# Altium PCB SKY32B750_OSPI_EVB1_V3.1.PcbDoc (part 2 of 2)
Units mil, origin at the board's own origin, x right, y up, seen from the top; angles counter-clockwise.
Board outline 3267.72 x 2283.46 mil, 4 copper layers (Top Layer 1, VCC, GND, Bottom Layer 1), stack 22.732 mil thick; 94 components, 135 nets, 508 pads, 620 vias.
Unrouted connection lines stored in the file: 134.
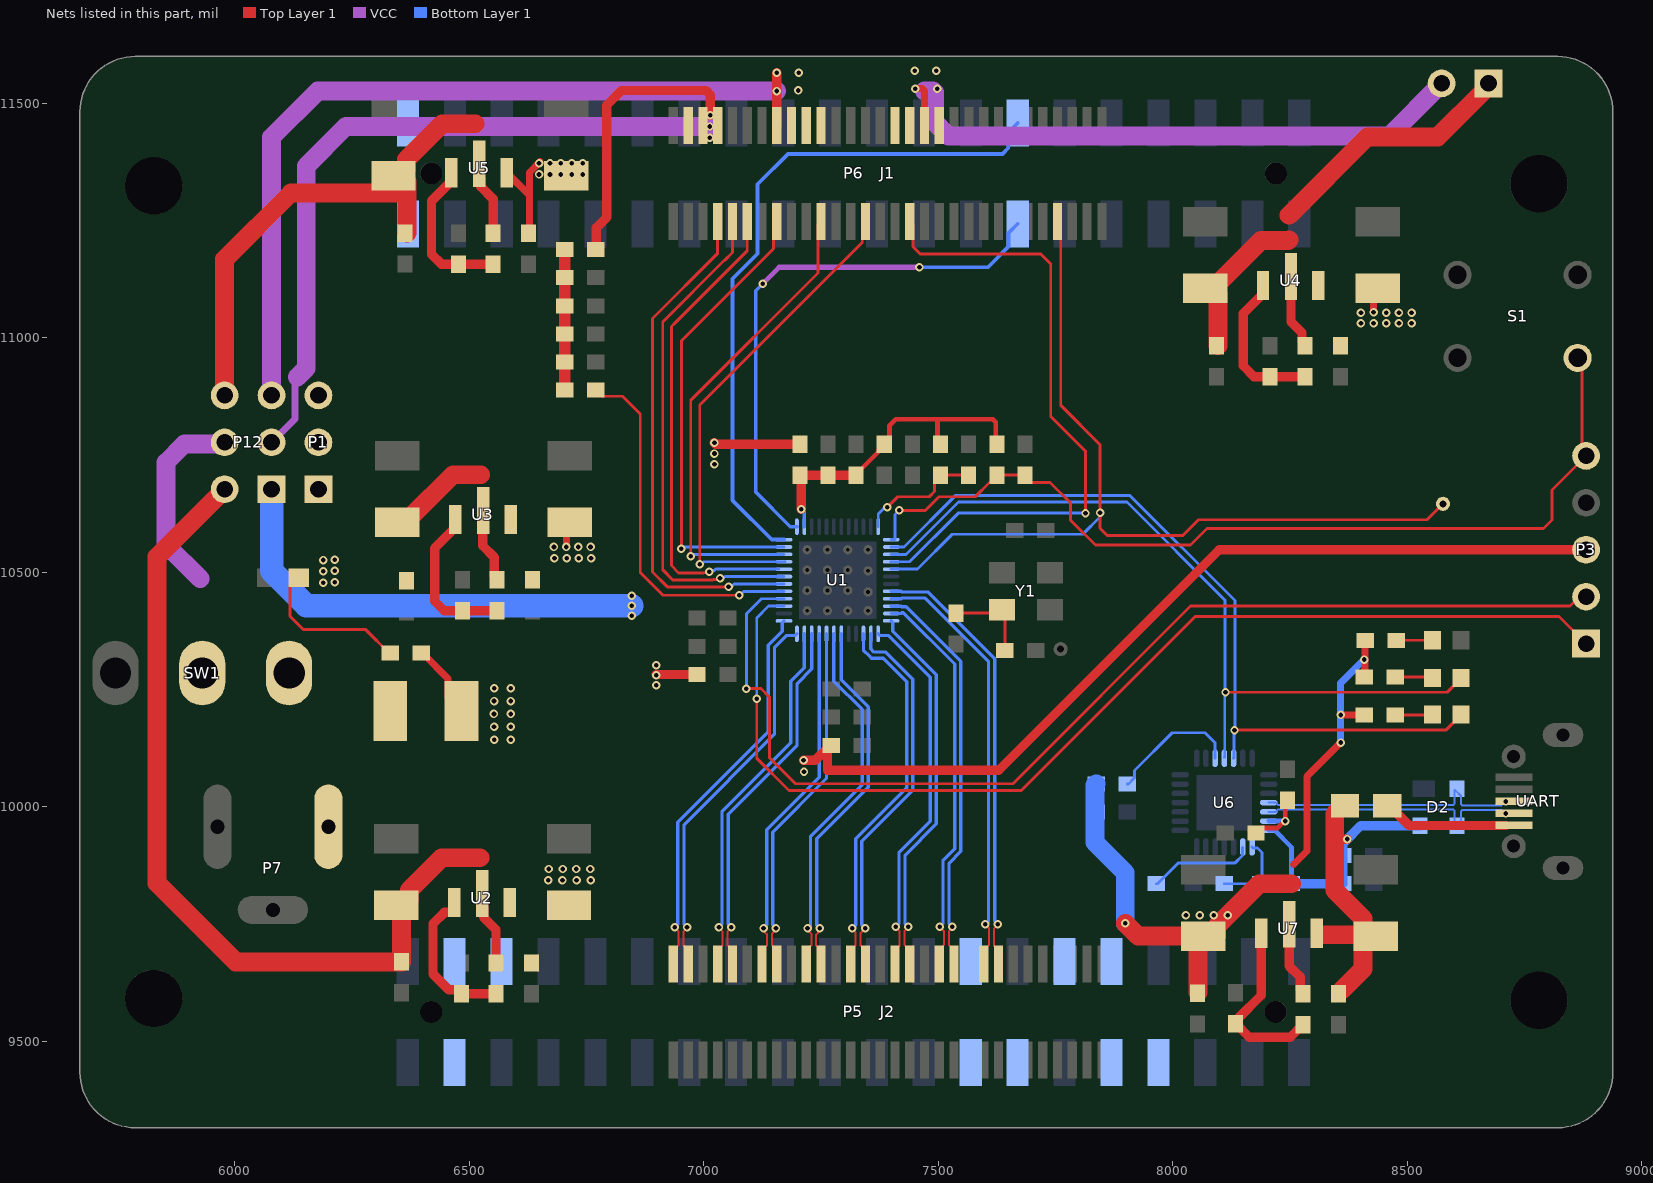
[diagram p4: the nets of this part, all layers, seen from the top]

## Via types
v1: diameter 18, hole 10, Top Layer 1 to Bottom Layer 1, tented both sides, 611 vias
v2: diameter 19.68, hole 7.87, Top Layer 1 to Bottom Layer 1, tented both sides, 9 vias

## Nets (pads, with @x,y where several pads share a name; then routed paths per layer and width w, separated by ;. In a path a pad name is that pad's centre, name@x,y a point inside that pad or via, vN(x,y) a via of type N, cw(c..) or ccw(c..) an arc to the next point about the centre after c; other vN are vias at no path point) (continued)
GPIO_0.8: P6.13 U1.13 | length 1182.4
  VCC w10.87: v1(7126,11115) 7161.24,11150.24 v1(7459.94,11150.24)
  Bottom Layer 1 w8: v1(7126,11115) 7110.91,11099.91 7110.91,10671.09 7184.83,10597.17 U1.13@7198.9,10597.17 ; v1(7459.94,11150.24) 7606.24,11150.24 7650.09,11194.09 7650.09,11223.15 P6.13@7669.69,11242.75
GPIO_0.9: P6.14 U1.12 | length 1468.3
  Bottom Layer 1 w8: U1.12@7171.34,10569.61 7145.39,10569.61 7061.7,10653.3 7061.7,11125.7 7115,11179 7115,11327 7179.79,11391.79 7636.79,11391.79 7649.17,11404.17 7649.17,11437.23 P6.14@7669.69,11457.75
GPIO_3.0: R64.2 U1.5 | length 785.2
  Top Layer 1 w6.16: R64.2@6770,10888 6782.92,10875.08 6826.92,10875.08 6864.89,10837.11 6864.89,10499.57 6913.35,10451.11 v1(7075.94,10451.11)
  Bottom Layer 1 w6.16: v1(7075.94,10451.11) 7077.65,10451.11 7085.93,10459.39 7121.69,10459.39 ; 7119.99,10459.38 U1.5@7171.34,10459.38
IFOUT1.1_N: J2.4 U1.48 | length 824.2
  Top Layer 1 w4.29: v1(6964.69,9743.41) 6964.69,9741.9 6956.84,9734.04 6956.84,9704.89 6966.99,9694.74 J2.4@6966.99,9665.21
  Bottom Layer 1 w7.07: v1(6964.69,9743.41) 6958.23,9749.88 6958.23,9961.74 7151,10154.52 7151,10339.24 7177.05,10365.29 7195.37,10365.29 U1.48@7198.9,10368.83
IFOUT1.1_P: J2.2 U1.1 | length 835.4
  Top Layer 1 w4.29: J2.2@6935.49,9665.21 6935.49,9694.74 6946.55,9705.79 6946.55,9734.04 6938.69,9741.9 v1(6938.69,9743.41)
  Bottom Layer 1 w7.07: v1(6938.69,9743.41) 6945.16,9749.88 6945.16,9967.16 7137.93,10159.93 7137.93,10344.66 7167.81,10374.53 7167.81,10392.85 U1.1@7171.34,10396.39
IFOUT1.2_N: J2.10 U1.46 | length 748.7
  Top Layer 1 w4.29: J2.10@7054.51,9701.7 7053.78,9702.43 7053.39,9702.43 7050.88,9704.95 7050.88,9715.27 7050.81,9715.34 7050.81,9721.29 7050.82,9725.55 7050.8,9733.71 7058.65,9741.57 v1(7058.65,9743.08)
  Bottom Layer 1 w7.07: v1(7058.65,9743.08) 7052.19,9749.54 7052.19,9984.64 7199.07,10131.52 7199.07,10262.59 7230.4,10293.91 U1.46@7230.4,10368.83
IFOUT1.2_P: J2.8 U1.47 | length 749
  Top Layer 1 w4.29: v1(7032.65,9743.08) 7032.65,9741.57 7040.51,9733.71 7040.51,9721.31 7040.52,9711.08 7040.59,9711.01 7040.59,9704.95 7038.07,9702.43 7037.68,9702.43 J2.8@7035.89,9700.64
  Bottom Layer 1 w7.07: v1(7032.65,9743.08) 7039.12,9749.54 7039.12,9990.06 7186,10136.94 7186,10268 7214.65,10296.65 U1.47@7214.65,10368.83
IFOUT1.3_N: J2.16 U1.44 | length 762
  Top Layer 1 w4.29: v1@7154.15,9738.78 7154.15,9737.77 7145.36,9728.98 7145.36,9704.95 7147.87,9702.43 7148.26,9702.43 7155.96,9694.74 J2.16@7155.96,9665.21
  Top Layer 1 w8: v1@7154.15,9738.78 v1(7154.15,9741.48)
  Bottom Layer 1 w7.07: v1(7154.15,9741.48) 7147.5,9748.13 7147.5,9946.02 7261.89,10060.41 U1.44@7261.89,10368.83
IFOUT1.3_P: J2.14 U1.45 | length 760.3
  Top Layer 1 w4.29: J2.14@7124.47,9665.21 7124.47,9694.74 7132.17,9702.43 7132.56,9702.43 7135.07,9704.95 7135.07,9728.12 7130.4,9732.79 7130.4,9738.83 v1(7127.78,9741.45)
  Bottom Layer 1 w7.07: v1(7127.78,9741.45) 7134.43,9748.11 7134.43,9951.43 7246.15,10063.15 U1.45@7246.15,10368.83
IFOUT2.1_N: J2.22 U1.42 | length 783.6
  Top Layer 1 w4.29: v1(7247.47,9740.91) 7244.85,9738.29 7244.85,9732.67 7239.85,9727.67 7239.85,9704.95 7242.36,9702.43 7242.75,9702.43 7250.45,9694.74 J2.22@7250.45,9665.21
  Bottom Layer 1 w7.07: v1(7247.47,9740.91) 7241.01,9747.38 7241.01,9932.01 7351.07,10042.07 7351.07,10212.93 7293.39,10270.61 U1.42@7293.39,10368.83
IFOUT2.1_P: J2.20 U1.43 | length 755.3
  Top Layer 1 w4.29: J2.20@7218.96,9694.74 7226.66,9702.43 7227.05,9702.43 7229.56,9704.95 7229.56,9729.11 7221.47,9737.2 v1(7221.47,9740.91)
  Bottom Layer 1 w7.07: v1(7221.47,9740.91) 7227.94,9747.38 7227.94,9937.42 7338,10047.48 7338,10207.52 7277.64,10267.87 U1.43@7277.64,10368.83
IFOUT2.2_N: J2.28 U1.38 | length 812.2
  Top Layer 1 w4.29: v1(7344.27,9741.19) 7344.27,9740.89 7334.34,9730.96 7334.34,9704.95 7336.85,9702.43 7337.24,9702.43 7344.94,9694.74 J2.28@7344.94,9665.21
  Bottom Layer 1 w7.07: v1(7344.27,9741.19) 7337.23,9748.23 7337.23,9926.74 7446.07,10035.59 7446.07,10272.06 7388.13,10330 7363,10330 7356.38,10336.62 U1.38@7356.38,10368.83
IFOUT2.2_P: J2.26 U1.39 | length 812.1
  Top Layer 1 w4.29: J2.26@7313.45,9665.21 7313.45,9694.74 7321.15,9702.43 7321.54,9702.43 7324.05,9704.95 7324.05,9731.64 7317.12,9738.57 v1(7317.12,9741)
  Bottom Layer 1 w7.07: v1(7317.12,9741) 7324.16,9748.04 7324.16,9932.16 7433,10041 7433,10266.65 7382.72,10316.93 7357.59,10316.93 7353.76,10320.76 7340.63,10333.88 U1.39@7340.63,10368.83
IFOUT2.3_N: J2.34 U1.36 | length 843.9
  Top Layer 1 w4.29: v1(7435.92,9744.11) 7435.92,9742.66 7428,9734.74 7428,9706.17 7437.68,9696.49 7439.43,9694.74 J2.34@7439.43,9665.21
  Top Layer 1 w8: v1(7435.92,9744.11) v1@7437.68,9742.35 ; J2.34@7437.68,9696.49 7437.68,9666.96 J2.34@7439.43,9665.21
  Bottom Layer 1 w7.07: U1.36@7399.69,10396.39 7403.22,10392.85 7403.22,10374.53 7496.07,10281.69 7496.07,9963.59 7429.39,9896.91 7429.39,9750.64 v1(7435.92,9744.11)
IFOUT2.3_P: J2.32 U1.37 | length 797.9
  Top Layer 1 w4.29: J2.32@7407.93,9665.21 7407.93,9694.74 7417.71,9704.52 7417.71,9734.74 7409.79,9742.66 v1(7409.79,9744.11)
  Bottom Layer 1 w7.07: U1.37@7372.13,10368.83 7375.67,10365.29 7393.98,10365.29 7483,10276.27 7483,9969 7416.32,9902.32 7416.32,9750.64 v1(7409.79,9744.11)
IFOUT3.1_N: J2.40 U1.34 | length 862.5
  Top Layer 1 w4.29: v1(7529.83,9744.13) 7529.83,9741.73 7522.85,9734.76 7522.85,9705.8 7533.92,9694.74 J2.40@7533.92,9665.21
  Bottom Layer 1 w7.07: U1.34@7399.69,10427.88 7420.94,10427.88 7422.28,10426.54 7431.41,10426.54 7548.07,10309.89 7548.07,9905.07 7523.19,9880.19 7523.19,9750.76 v1(7529.83,9744.13)
IFOUT3.1_P: J2.38 U1.35 | length 841.3
  Top Layer 1 w4.29: J2.38@7502.42,9665.21 7510.12,9672.91 7510.12,9703.73 7512.56,9706.18 7512.56,9734.32 7503.49,9743.39 v1(7503.49,9744.42)
  Bottom Layer 1 w7.07: U1.35@7399.69,10412.13 7420.94,10412.13 7422.28,10413.47 7426,10413.47 7535,10304.47 7535,9910.48 7510.12,9885.61 7510.12,9751.06 v1(7503.49,9744.42)
IFOUT3.2_N: J2.46 U1.32 | length 940.3
  Top Layer 1 w4.29: v1(7626.93,9749.92) 7626.93,9748.63 7618.85,9740.55 7618.85,9704.3 7628.41,9694.74 J2.46@7628.41,9665.21
  Bottom Layer 1 w7.07: U1.32@7399.69,10459.38 7420.94,10459.38 7422.28,10458.04 7477.41,10458.04 7620.3,10315.15 7620.3,9756.54 v1(7626.93,9749.92)
IFOUT3.2_P: J2.44 U1.33 | length 919.5
  Top Layer 1 w4.29: J2.44@7596.91,9665.21 7596.91,9694.74 7608.56,9706.38 7608.56,9740.64 7600.61,9748.59 v1(7600.61,9750.01)
  Bottom Layer 1 w7.07: U1.33@7399.69,10443.63 7420.94,10443.63 7422.28,10444.97 7472,10444.97 7607.23,10309.74 7607.23,9756.63 v1(7600.61,9750.01)
IO45: P5.16
IO57: P5.7
MD0: P5.38
MD1: P5.37
MD2: P5.36
MISO: P5.10
MOSI: P5.9
NetC5_1: C5.1 R1.2 Y1.1 | length 190.2
  Top Layer 1 w6.16: C5.1@7538,10413 7628.61,10413 Y1.1@7635.61,10420.01 7642,10413.62 R1.2@7642,10333
NetD1_1: D1.1 R31.2 | length 333.8
  Top Layer 1 w6.16: D1.1@6137,10487.87 6135.03,10487.87 6118.43,10471.26 6118.43,10406.43 6147.2,10377.66 6279.84,10377.66 R31.2@6329.5,10328
NetF1_1: F1.1 SW1.2
NetP7_1: P7.1 SW1.3
NetPWR_1: PWR.1 R9.2 | length 79.5
  Top Layer 1 w6.16: R9.2@8476.58,10355 PWR.1@8556.06,10355
NetR10_1: R10.1 R11.1 U6.8 | length 170.7
  Bottom Layer 1 w6.16: R11.1@8110,9836.19 8184.52,9836.19 R10.1@8187.02,9836.19 8190,9839.17 8190,9902.88 8180.59,9912.29 8171.28,9912.29 U6.8@8169.06,9914.51
NetR12_1: R12.1 U6.9 | length 225.5
  Bottom Layer 1 w6.16: R12.1@7964.83,9836.19 7967.33,9836.19 8011.1,9879.96 8131.95,9879.96 8148.29,9896.3 U6.9@8148.29,9913.43
NetR13_1: R13.1 TX.1 | length 79.9
  Top Layer 1 w6.16: R13.1@8474.45,10195.92 8552.86,10195.92 TX.1@8553.94,10197
NetR14_1: R14.1 RX.1 | length 80.1
  Top Layer 1 w6.16: R14.1@8474.45,10276.47 8552.46,10276.47 RX.1@8553.94,10275
NetR21_2: R21.2 R22.2 R23.2 R24.2 R50.1 R64.1 | length 300
  Top Layer 1 w25: R64.1@6704,10888 R24.2@6704,10948 R23.2@6704,11008 R22.2@6704,11068 R21.2@6704,11128 R50.1@6704,11188
NetR25_1: R25.1 R26.2 U7.1 | length 381.5
  Top Layer 1 w20: U7.1@8188.34,9730.57 8188.34,9598.34 8140,9550 8140,9544 R26.2@8134,9538 8163,9509 8250.53,9509 R25.1@8277.33,9535.8
NetR35_1: R35.1 R36.2 U2.1 | length 334.8
  Top Layer 1 w20: U2.1@6468.46,9796.07 6468.46,9778.29 6465.23,9775.06 6447.46,9775.06 6423.12,9750.72 6423.12,9643.88 6457.2,9609.8 6477.78,9609.8 6483.78,9603.8 R36.2@6483.78,9601.3 R35.1@6557.45,9601.3
NetR54_1: R54.1 R56.2 U3.1 | length 333.2
  Top Layer 1 w20: U3.1@6470.34,10612.57 6470.34,10594.8 6427,10551.45 6427,10438 6447.2,10417.8 R56.2@6485.67,10417.8 R54.1@6559.33,10417.8
NetR55_1: R55.1 R57.2 U4.1 | length 330.1
  Top Layer 1 w6.16: U4.1@8192.34,11093.8 U4.1@8192.34,11111.57
  Top Layer 1 w20: U4.1@8192.34,11093.8 8150,11051.45 8150,10940 8173.2,10916.8 R57.2@8207.67,10916.8 R55.1@8281.33,10916.8
NetR58_1: R58.1 R59.2 U5.1 | length 331.2
  Top Layer 1 w20: U5.1@6462.34,11351.57 6462.34,11333.8 6420,11291.45 6420,11178 6441.2,11156.8 R59.2@6477.67,11156.8 R58.1@6551.33,11156.8
RAMSYNC: J1.53 pad.2@8576,10646 U1.29 | length 1957.7
  Top Layer 1 w6.16: J1.53@7754.39,11247.89 7761.15,11241.13 7761.15,10855.85 7845,10772 v1(7845,10627) 7845,10594 7861,10578 8021,10578 8055,10612 8542,10612 pad.2@8576,10646
  Bottom Layer 1 w6.16: U1.29@7399.69,10506.62 7400.02,10506.95 7455.78,10506.95 7529.83,10581 7808,10581 7845,10618 v1(7845,10627)
RF1_CS: J1.15 U1.11 | length 998.9
  Top Layer 1 w6.16: v1(6952.48,10550.05) 6952.48,10992.94 6959.31,10999.78 ; 6959.26,10999.83 7149.2,11189.76 7149.2,11241.13 J1.15@7155.96,11247.89
  Bottom Layer 1 w6.16: v1@6955.98,10550.35 6959.5,10553.87 U1.11@7171.34,10553.87
RF2_CS: J1.21 U1.10 | length 1031.6
  Top Layer 1 w6.16: v1(6972.57,10534.37) 6972.57,10866.57 7243.69,11137.69 7243.69,11241.13 J1.21@7250.45,11247.89
  Bottom Layer 1 w6.16: v1@6968.4,10538.12 U1.10@7171.34,10538.12
RF3_CS: J1.27 U1.9 | length 1061
  Top Layer 1 w6.16: v1@6990.86,10517.46 6991.84,10518.44 6991.84,10856.84 7338.18,11203.18 7338.18,11241.13 J1.27@7344.94,11247.89
  Bottom Layer 1 w6.16: v1(6991.84,10516.83) 6995.05,10516.83 7000.67,10522.46 7045.46,10522.46 7045.55,10522.37 U1.9@7171.34,10522.37 7172.91,10522.37 U1.9@7173.22,10522.68
RF4_CS: J1.33 U1.28 | length 1384.7
  Top Layer 1 w6.16: J1.33@7439.43,11247.89 7446.19,11241.13 7446.19,11194 7462.19,11178 7719,11178 7740,11157 7740,10832 7814,10758 v1(7814,10626)
  Bottom Layer 1 w6.16: U1.28@7399.69,10522.37 7438.95,10522.37 7542.58,10626 v1(7814,10626)
RST_N: C12.2 P3.5 R3.1 S1.4 U1.25 | length 1988.1
  Top Layer 1 w6.16: v1(7417,10632) 7473,10632 7502,10661 7579,10661 7609.58,10691.58 7612.08,10691.58 7625,10704.5 R3.1@7625,10707 C12.2@7685,10707 7685,10704.5 7697.92,10691.58 7738.42,10691.58 7782,10648 7782,10611 7793,10600 7835,10558 8038,10558 8073,10593 8790,10593 8808.44,10611.44 8808.44,10675.44 P3.5@8881,10748 8872,10757 8872,10948 S1.4@8863,10957
  Bottom Layer 1 w6.16: U1.25@7399.69,10569.61 7407.37,10569.61 7408.16,10570.41 7408.16,10623.16 v1(7417,10632)
RTS: R16.2 U6.24 | length 283.4
  Bottom Layer 1 w6.16: R16.2@7903,10049 7905.5,10049 7918.42,10061.92 7918.42,10077.42 7999,10158 8068.63,10158 8089.63,10137 8089.63,10104.17 U6.24@8090.31,10103.49
SCL: P6.39
SD: P5.13
SDA: P6.40
SPICLK_RF: J1.11 U1.8 | length 1035.3
  Top Layer 1 w6.16: 6939.39,11031.96 6931.24,11023.81 6931.24,10514.22 6946.7,10498.75 6999.33,10498.75 6999.55,10498.97 v1@7008.53,10498.97 ; 6939.57,11031.78 7092.97,11185.18 J1.11@7092.97,11247.89
  Bottom Layer 1 w6.16: v1(7011.77,10501.24) 7014.04,10503.51 7022.88,10503.51 7026,10506.62 7159.6,10506.62 U1.8@7160.06,10507.08
SPIMISO_RF: J1.7 U1.6 | length 1100.3
  Top Layer 1 w6.16: J1.7@7029.98,11247.89 7029.98,11180.02 6890.9,11040.94 6890.9,10500.68 6922.64,10468.93 7051.47,10468.93 v1@7052.33,10468.08
  Bottom Layer 1 w6.16: v1(7053.21,10469.45) 7055.04,10471.27 7060.82,10471.27 7064.78,10475.23 7120.06,10475.23 ; 7120.06,10475.13 U1.6@7171.34,10475.13
SPIMOSI_RF: J1.9 U1.7 | length 1074.3
  Top Layer 1 w6.16: v1(7034.96,10487.01) 7032.69,10484.75 7020.85,10484.75 7019.26,10483.16 6935.03,10483.16 6912.92,10505.27 6912.92,11033.53 7044.81,11165.42 ; 7044.98,11165.24 7061.48,11181.74 J1.9@7061.48,11247.89
  Bottom Layer 1 w6.16: v1@7036.1,10485.99 7037.64,10487.53 7042.49,10487.53 7045.83,10490.87 U1.7@7171.34,10490.87
SSN: P5.12
SWD_CLK: P3.1 U1.3 | length 2341.4
  Top Layer 1 w6.16: v1(7113.29,10230.41) 7113.29,10103.71 7182,10035 7677,10035 8048,10406 8823,10406 P3.1@8881,10348
  Bottom Layer 1 w6.16: v1(7113.29,10230.41) 7113.29,10402.71 7138.45,10427.88 U1.3@7171.34,10427.88
SWD_DIO: P3.2 U1.4 | length 2367.7
  Top Layer 1 w6.16: v1(7091,10252) 7122,10252 7140,10234 7140,10105 7195.84,10049.16 7659.16,10049.16 8038,10428 8846.69,10428 8866.69,10448 P3.2@8881,10448
  Bottom Layer 1 w6.16: v1(7091,10252) 7091,10411.04 7123.59,10443.63 U1.4@7171.34,10443.63
TEST_MODE: R5.1 R6.2 U1.24 | length 267
  Top Layer 1 w6.16: v1(7391.43,10638.61) 7413.82,10661 7481,10661 7492.08,10672.08 7492.08,10694.08 R6.2@7505,10707 R5.1@7565,10707
  Bottom Layer 1 w6.16: U1.24@7372.13,10597.17 7372.13,10624.13 7384.35,10636.35 7389.17,10636.35 v1(7391.43,10638.61)
UART_RX: TX.2 U1.26 U6.26 | length 1706.1
  Top Layer 1 w6.16: v1(8131.53,10163.38) 8581.93,10163.38 8614.57,10196.02 TX.2@8614.57,10197
  Bottom Layer 1 w6.16: U1.26@7399.69,10553.87 7427.14,10553.87 7537.28,10664 7908,10664 8132.41,10439.59 8132.41,10164.26 v1(8131.53,10163.38) 8130.61,10162.46 8130.61,10104.41 U6.26@8129.69,10103.49
UART_TX: RX.2 U1.27 U6.25 | length 1696.4
  Top Layer 1 w6.16: v1(8112.33,10244.37) 8584.92,10244.37 8614.57,10274.02 RX.2@8614.57,10275
  Bottom Layer 1 w6.16: U1.27@7399.69,10538.12 7431.42,10538.12 7543.14,10649.84 7902.13,10649.84 8111.49,10440.49 8111.49,10245.22 v1(8112.33,10244.37) 8110.74,10242.79 8110.74,10106.39 U6.25@8110,10105.65
USB_N: D2.3 U6.5 UART.2 | length 571.2
  Bottom Layer 1 w4.29: U6.5@8204.49,9989.32 8219.32,9989.32 8224.02,9994.01 8598.23,9994.01 8600.74,9991.5 8600.74,9957 8614.34,9970.6 8614.34,9990.41 8616.86,9992.93 8700.63,9992.93 8704.76,9988.8 v1@8710,9988.8
  other v1: 8710,9985.8
USB_P: D2.2 U6.4 UART.3 | length 564.4
  Bottom Layer 1 w4.29: U6.4@8204.49,10009 8219.32,10009 8224.02,10004.3 8598.23,10004.3 8600.74,10006.82 8600.74,10035.74 8601.77,10035.74 8614.34,10023.17 8614.34,10005.73 8616.86,10003.22 8700.45,10003.22 8708.87,10011.64 v1@8709.76,10011.64
  other v1: 8710,10011.4
V_MCU: C13.2 C15.1 P12.2 R35.2 U2.2 | length 2007.3
  Top Layer 1 w20: U2.2@6528.12,9815.3 6528.12,9788.29 6531.34,9785.06 6531.34,9764.27 6557.45,9738.16 R35.2@6557.45,9667.3
  Top Layer 1 w40: P12.2@5979,10677 5835,10533 5835,9837 6002.5,9669.5 C13.2@6356.12,9669.5 6356.12,9783.65 6362.41,9789.94 C15.1@6362.41,9791.51 ; C15.1@6345.08,9789.94 6360.83,9789.94 6372.33,9801.44 6372.33,9822.33 6441.51,9891.51 6523.13,9891.51
V_RF1: C8.2 C17.1 P12.4 R54.2 U3.2 | length 802.9
  Top Layer 1 w6.16: U3.2@6529.14,10621 6529.14,10630.94 U3.2@6530,10631.8
  Top Layer 1 w20: U3.2@6529.14,10621 6529.14,10556.5 6553.33,10532.3 6553.33,10489.8 R54.2@6559.33,10483.8
  Top Layer 1 w40: C17.1@6346.97,10606.44 6364.29,10606.44 6364.29,10608.02 6374.21,10617.94 6375.79,10617.94 6465.86,10708.02 6525.02,10708.02
  VCC w40: 5926.96,10486.04 5854,10559 5854,10734 5893.35,10773.35 5975.35,10773.35 P12.4@5979,10777
  other v1: 6189,10477.87 6214,10478.87 6189,10501.94 6214,10502.94 6189,10526 6214,10527
V_RF2: C23.2 C25.1 P12.6 R58.2 U5.2 | length 1247.8
  Top Layer 1 w20: U5.2@6522,11370.8 6522,11343.79 6525.23,11340.56 6525.23,11321.77 6551.33,11295.67 R58.2@6551.33,11222.8
  Top Layer 1 w40: P12.6@5979,10877 5979,11167 6120.44,11308.44 6340.97,11308.44 ; C25.1@6338.97,11345.44 C25.1@6354.72,11345.44 ; 6356.72,11308.44 6358.29,11308.44 6358.29,11310.02 C25.1@6367.69,11319.42 ; C23.2@6367.69,11223 C25.1@6367.69,11319.42 ; 6513,11456 6443,11456 6366.21,11379.21 6366.21,11356.94 C25.1@6354.72,11345.44 ; C25.1@6354.72,11345.44 6367.69,11332.47 C25.1@6367.69,11319.42
V_RF3: C19.2 C21.1 P13.1 R55.2 U4.2 | length 1054.9
  Top Layer 1 w20: U4.2@8252,11130.8 8252,11034 8275.33,11010.67 8275.33,10991.3 8281.33,10985.3 R55.2@8281.33,10982.8
  Top Layer 1 w40: C21.1@8068.97,11105.44 C21.1@8084.72,11105.44 ; C19.2@8096.21,10983 8096.21,11093.95 C21.1@8084.72,11105.44 ; 8248,11209 8246.02,11207.02 8187.86,11207.02 8097.79,11116.94 8096.21,11116.94 8086.29,11107.02 8086.29,11105.44 C21.1@8084.72,11105.44 ; 8248,11261 8415,11428 8564.66,11428 8663.47,11526.81 8663.47,11532.47 P13.1@8673,11542
VCC3V0_MCU: P3.3 P12.1 R32.1 R33.1 R34.1 | length 3163.3
  Top Layer 1 w20: v1@6899,10282 R34.1@6986,10282 ; v1(7023,10776) 7026,10773 R32.1@7205,10773 ; v1(7213,10099) 7237.5,10099 7263.5,10125 7264,10125 7264,10078 7629,10078 8099,10548 P3.3@8881,10548
  Bottom Layer 1 w50: P12.1@6079,10677 6079,10503.11 6153.11,10429 v1@6847,10429
  other v1: 7214,10075 6899,10259 6899,10280.5 6899,10302 6847,10407 6847,10428.5 6847,10450 7023,10730 7023,10753
VCC3V0_RF1: J1.4 J1.6 J1.8 P12.3 R50.2 | length 2112.8
  Top Layer 1 w20: R50.2@6770,11188 6771,11189 6771,11234 6793.45,11256.45 6793.45,11495.45 6825,11527 7005,11527 7014,11518 v1(7014,11474)
  VCC w15: P12.3@6079,10777 6129,10827 6129,10911 6134,10916
  VCC w40: 6134,10916 6153,10935 6153,11365.62 6237.56,11450.18 v1(7013,11450.18)
  other v1: 7013,11426
VCC3V0_RF2: J1.16 J1.18 J1.20 J1.22 P12.5 | length 1779.9
  Top Layer 1 w20: J1.16@7155.96,11452.61 v1(7156,11565) v1(7156,11565)
  VCC w40: P12.5@6079,10877 6079,11427 6177.64,11525.64 v1(7155.59,11525.64)
  other v1: 7202,11527 7203,11565
VCC3V0_RF3: J1.32 J1.34 J1.36 J1.38 P13.2 | length 1320.5
  Top Layer 1 w15: v1(7451,11530.88) 7466.12,11530.88 7470.93,11526.07 J1.36@7470.93,11452.61
  VCC w40: 7470.93,11526.07 7488.93,11526.07 7492,11523 7492,11460 7522,11430 8461,11430 P13.2@8573,11542
  other v1: 7498,11530.88 7450,11569 7496,11569
VCC5V: C9.1 C14.1 C16.2 C18.2 C20.1 C22.2 C24.1 C26.2 F1.2 R31.1 U2.3 U3.3 U4.3 U5.3 | length 517.4
  Top Layer 1 w15: R31.1@6398,10328 6400.5,10328 6455.5,10273 6455.5,10232.5 F1.2@6484,10204 ; U5.3@6586.18,11364.5 6580.45,11358.77 U5.3@6580.45,11351.57 6628.5,11303.52 ; C26.2@6627,11222.8 6628.5,11224.3 6628.5,11303.52 ; v1@6651,11375 6628.5,11352.5 6628.5,11303.52 ; v1(6707,10554) 6707.5,10554.5 6707.5,10598.98 C9.1@6714.97,10606.44 ; v1(8428,11054) 8428,11096.48 C20.1@8436.97,11105.44
  other v1: 6669.12,9843.5 6699.12,9843.5 6729.12,9843.5 6759.12,9843.5 6670.12,9867.5 6699.45,9867.5 6728.78,9867.5 6758.12,9867.5 6554,10143 6589,10143 6553.33,10170.5 6589,10170.5 6553,10198 6589,10198 6553.33,10225.5 6589,10225.5 6554,10253 6589,10253 6682,10530 6708,10530 6734,10530 6760,10530 6681,10554 6733,10554 6759,10554 8401,11031 8428,11031 8455,11031 8482,11031 8509,11031 8401,11053 8455,11053 8482,11053 8509,11053 6649.25,11348 6672.5,11348 6695.75,11348 6719,11348 6742.25,11348 6649.25,11372 6672.5,11372 6695.75,11372 6719,11372 6742.25,11372
VDD: C32.1 C33.1 U6.6 | length 155.2
  Top Layer 1 w10: C33.1@8177.48,9943.74 8188.48,9954.74 8222.94,9954.74 8237.84,9969.63 v1(8240,9969.63) 8240,10009 C32.1@8245,10014
  Bottom Layer 1 w10: U6.6@8204.49,9969.63 v1(8240,9969.63)
VDD_3V0: C34.1 C35.2 P1.1 P1.2 P1.3 R9.1 R12.2 R13.2 R14.2 R15.1 R16.1 R25.2 U7.2 | length 1683.2
  Top Layer 1 w15: 8257,9877 8286,9906 8286,10065.15 v1(8357.92,10137.08) ; v1(8357.92,10195.92) R13.2@8408.45,10195.92 R13.2@8406.53,10194 ; 8408.45,10293.86 R14.2@8408.45,10276.47 8409.52,10277.54 8409.52,10353.94 R9.1@8410.58,10355
  Top Layer 1 w20: U7.2@8248,9749.8 8248,9661 8271.33,9637.67 8271.33,9610.3 8277.33,9604.3 R25.2@8277.33,9601.8
  Top Layer 1 w40: v1(7899,9752) 7926.56,9724.44 C34.1@8064.97,9724.44 ; C35.2@8054,9604.71 8054,9713.48 C34.1@8064.97,9724.44 ; 8253.02,9836.19 8184.4,9836.19 8117.1,9768.9 8093.63,9745.42 8093.63,9724.44 C34.1@8064.97,9724.44
  Bottom Layer 1 w15: v1(8357.92,10137.08) v1(8357.92,10195.92) 8357.92,10264.03 v1(8407.89,10314)
  Bottom Layer 1 w40: R16.1@7837,10049 7834,10046 7834,9924.51 7898.83,9859.68 R12.2@7898.83,9836.19 7898.83,9752.17 v1(7899,9752)
  other v1: 8028,9769 8057.67,9769 8087.33,9769 8117,9769
VDD_5V: C30.1 C31.1 C36.1 C37.2 D2.4 F2.2 R10.2 U6.7 U7.3 | length 1086.7
  Top Layer 1 w20: 8345,9931.29 v1(8371.86,9931.29)
  Top Layer 1 w40: U7.3@8319.07,9727.51 C36.1@8405.72,9727.51 ; C37.2@8361.6,9610.4 8405.72,9654.53 8405.72,9712.95 8417.22,9724.44 8405.72,9735.94 8405.72,9761.35 8345,9822.08 8345,9931.29 8345,9985 8362,10002 F2.2@8367,10002
  Bottom Layer 1 w10: U6.7@8204.49,9949.94 8217.28,9949.94 8253.02,9914.2 R10.2@8253.02,9836.19
  Bottom Layer 1 w20: R10.2@8253.02,9836.19 C30.1@8362.13,9836.19 C31.1@8362.13,9896.32 8362.13,9921.56 8367.98,9927.4 8400.58,9960 D2.4@8527,9960
VDD_IO: C10.2 C11.2 R3.2 R6.1 R8.1 R32.2 U1.14 | length 743.7
  Top Layer 1 w10: C11.2@7325,10707 7325,10709.5 7374,10758.5 7374,10762 R8.1@7385,10773 7396,10784 7396,10812 7410,10826 7498.52,10826 ; R6.1@7505,10773 7498.52,10779.48 7498.52,10826 ; R3.2@7625,10773 7622.52,10775.48 7622.52,10820.14 7616.66,10826 7498.52,10826
  Top Layer 1 w20: v1(7208,10634) 7208,10704 R32.2@7205,10707 C10.2@7265,10707 C11.2@7325,10707
  Bottom Layer 1 w8: v1(7208,10634) 7208,10631.29 7214.59,10624.71 U1.14@7214.65,10597.17 U1.14@7214.65,10597.17 v1@7214.65,10634
VIN: F2.1 UART.1 | length 270.3
  Top Layer 1 w20: F2.1@8457,10002 8462,10002 8503.8,9960.2 UART.1@8710,9960.2
WS: P5.15
pads on no net: J2.50 J2.52 J2.56 J2.58 P5.1 P5.2 P5.3 P5.4 P5.8 P5.17 P5.18 P5.39 P5.40 P6.1 P6.2 P6.3 P6.4 P6.24 P6.38 P7.2 S1.1 S1.2 SW1.1 U6.1 U6.2 U6.10 U6.11 U6.12 U6.13 U6.14 U6.15 U6.16 U6.17 U6.18 U6.19 U6.20 U6.21 U6.22 U6.27 U6.28

## Polygon pours and split planes (outlines as drawn)
DVSS on Bottom Layer 1 "Bottom Layer" (solid, remove dead copper, pour order 27): 5788.58,11599.56 ccw(c5788.58,11481.45) 5670.47,11481.45 5670.47,9434.2 ccw(c5788.58,9434.2) 5788.58,9316.09 8820.08,9316.09 ccw(c8820.08,9434.2) 8938.19,9434.2 8938.19,11486.84 ccw(c8819.63,11481) 8813.79,11599.56
DVSS on Top Layer 1 "Top Layer 1-DVSS" (solid, remove dead copper, pour order 29): 5788.58,11599.56 ccw(c5788.58,11481.45) 5670.47,11481.45 5670.47,9434.2 ccw(c5788.58,9434.2) 5788.58,9316.09 8820.08,9316.09 ccw(c8820.08,9434.2) 8938.19,9434.2 8938.19,11486.84 ccw(c8819.63,11481) 8813.79,11599.56
DVSS on GND (split plane): 8839.24,11577.78 8851.65,11574.46 8863.52,11569.54 8874.65,11563.12 8884.84,11555.3 8893.93,11546.21 8901.75,11536.02 8908.17,11524.89 8913.09,11513.02 8916.42,11500.61 8918.09,11487.87 8918.09,11481.45 8918.09,9434.2 8918.09,9427.78 8916.42,9415.04 8913.09,9402.63 8908.17,9390.76 8901.75,9379.63 8893.93,9369.44 8884.84,9360.35 8874.65,9352.53 8863.52,9346.11 8851.65,9341.19 8839.24,9337.87 8826.5,9336.19 5782.16,9336.19 5769.42,9337.87 5757.01,9341.19 5745.14,9346.11 5734.01,9352.53 5723.82,9360.35 5714.73,9369.44 5706.91,9379.63 5700.49,9390.76 5695.57,9402.63 5692.25,9415.04 5690.57,9427.78 5690.57,9434.2 5690.57,11481.45 5690.57,11487.87 5692.25,11500.61 5695.57,11513.02 5700.49,11524.89 5706.91,11536.02 5714.73,11546.21 5723.82,11555.3 5734.01,11563.12 5745.14,11569.54 5757.01,11574.46 5769.42,11577.78 5782.16,11579.46 8826.5,11579.46

## Keep-outs
Keep-Out Layer:
  the board outline again, w3.94

## Other copper
Top Layer 1:
  rectangle net DVSS: 8038,9402 8093,9537
  rectangle net VCC3V0_RF3: 7397,11470 7512,11583
  rectangle net DVSS: 7272,11461 7386,11548.08
  rectangle net DVSS: 8053,9518 8104,9556
  rectangle net DVSS: 7051,11466 7133.94,11579
  rectangle net VCC3V0_RF2: 7144,11473 7260,11580
  rectangle net VCC5V: 6641,11289 6756,11373
  rectangle net VCC3V0_MCU: 6888,10247 6919,10312
  rectangle net VCC5V: 6484,10134 6606,10268
  rectangle net VCC3V0_RF1: 6962,11417 7031,11484
  rectangle net DVSS: 7179.22,10375.32 7388.13,10589.3
  region net VCC5V: 6587.16,11383 6758,11383 6758,11373 6756,11289 6671,11286 6645,11260 6645,11195 6613,11195 6613,11265 6587.16,11286
  region net VCC3V0_MCU: 7204.55,10790.5 7011.94,10790.5 7010,10789 7010,10711.15 7025.85,10711.15 7046.15,10711.15 7091,10756 7205,10756
  pour cut-out: 7524.57,10545.57 7584,10605 7750,10605 7798.77,10556.23 7798.77,10342.03 7771.08,10314.34 7546.72,10314.34 7521.81,10339.24
  region net VCC3V0_MCU: 7210,10109 7204,10103 7204,10071 7211,10064 7261.55,10064 7262,10064.45 7262,10109 7261,10110
  region net DVSS: 6925,11250.15 6925,11152.18 6977.2,11152.18 7007,11181.98 7007,11250.15
  region net VCC5V: 8298,11141 8298,11081 8324,11063 8343,11036 8343,10971 8372.89,10971 8372.89,11022 8513,11022 8518,11028.15 8518,11091 8390,11091 8325,11091 8324,11141
  region net V_RF1: 6297,10614 6242,10559 6180,10559 6180,10471 6190,10461 6399,10461 6399,10611 6394,10616
  region net VDD_3V0: 8020,9782 8126,9782 8134,9774 8134,9768 8106,9740 8099,9747 8019,9747
  region net VCC5V: 6585.12,9827.32 6637.29,9879.5 6766.12,9879.5 6771.12,9874.5 6771.12,9860.5 6771.12,9754.5 6766.12,9749.5 6671.12,9749.5 6650.12,9728.5 6650.12,9664.5 6618.12,9664.5 6617.12,9665.5 6617.12,9747.5 6600.12,9764.5 6588.12,9764.5
  region net VCC5V: 6576,10603 6576,10570 6618,10528 6618,10480 6772,10480 6777,10485 6776,10486 6776,10601
  region net NetF1_1: 5883,10360 5878,10355 5878,10217 6001,10094 6349,10094 6374,10119 6374,10196 6160.08,10196 6051,10196 5982,10265 5982,10350 5969,10363
VCC:
  rectangle net VCC5V: 8388,11022 8513,11252
  rectangle net VCC3V0_RF3: 7439.43,11503 7512,11583
  rectangle net VCC3V0_RF2: 7144,11506 7214,11580
  rectangle net VCC3V0_RF1: 6996,11417 7031,11486
  rectangle net VCC5V: 6641,11271 6758,11373
  rectangle net VDD_3V0: 7974,9509 8130,9806
  region net VDD_3V0: 6150,10887.26 6150,10650 6160,10640 6184.85,10640 6296.85,10528 6293,10524.15 6293,9741 6636,9398 8008,9398 8128.58,9518.58 8128.58,9523.94 6736.06,9523.95 6397,9863 6397,10921 6190.72,10921
  region net VCC3V0_MCU: 7011.72,10790.72 6831,10790.72 6831,10610 6831,10070 6884.4,10016.6 7228,10016.6 7228,10087 7228,10107 7208,10107 6935,10107 6919,10123 6919,10567 6919,10608 7044,10711.15 7044,10790.72
  region net V_RF1: 6200.05,10559 6157.05,10516 5925.13,10516 5900,10490.87 5925.87,10465 6227,10465 6228,10466 6228,10560
  region net VCC5V: 6527,9882 6527,11210.47 6608.53,11292 8509,11292 8509,11225 6801,11225 6777,11201 6777,11131 6777,9764 6645,9764
  region net NetP7_1: 6067,10299 6067,10181 6164,10084 6164,9872 6179,9857 6225,9857 6234,9866 6234,10277 6157,10354 6156,10353 6069,10353
Bottom Layer 1:
  rectangle net VCC3V0_MCU: 6831,10396 6872,10461

## Silkscreen, mask and mechanical layers (free items; w line width, h text height)
Top Overlay:
  drawing of 3110 lines, arcs and shapes, not listed
  text "0.3" at 7951,11588 h30 r270
  text "0.9" at 7656,11587 h30 r270
  text "0.8" at 7711,11587 h30 r270
  text "0.7" at 7762,11587 h30 r270
  text "0.6" at 7817,11587 h30 r270
  text "0.5" at 7867,11587 h30 r270
  text "0.4" at 7909,11587 h30 r270
  text "0.2" at 7995,11587 h30 r270
  text "0.1" at 8056,11587 h30 r270
  text "0.0" at 8112.58,11587.35 h30 r270
  text "SKY32B750_OSPI_EVB_V3.1" at 5767,11493 h40
  text "V_RF3" at 8532,11453 h30 r270
  text "4 3 2 1" at 6914,11144 h30 r270
  text "CHIPEN" at 6975,11136 h30 r270
  text "USB_3V" at 6140,10938 h35
  text "V_RF2" at 5799,10860 h40
  text "RST" at 8583,10829 h100
  text "V_RF1" at 5796,10759 h40
  text "RST" at 8816.55,10696.73 h30 r90
  text "SYNC" at 8551,10680 h25
  text "V_MCU" at 5794,10655 h40
  text "G" at 8816.56,10634.32 h30 r90
  text "3V" at 8816.56,10516.37 h30 r90
  text "POWER_ON" at 6208.83,10419.01 h35 r270
  text "DIO" at 8817.27,10407.73 h30 r90
  text "DBST" at 7796,10324 h25
  text "SCK" at 8816.69,10302.17 h30 r90
Bottom Overlay:
  lines w3.94: 7788,9888 7781,9888 7781,9928 7870,9928 7870,9889 7871,9888 ; 7789,9888 7989,9888 8013,9864
  lines w8: 5667.35,9316.09 8939,9316.09 8939,11599.56 5667.35,11599.56 5667.35,9316.09
  lines w10: 8199,10228.1 8935.22,10228.1 8935.22,10790 8199,10790 8199,10228.1
  text "V5" at 8254,11514 h30 r270
  text "V33" at 8159,11511 h30 r270
  text "0.1" at 7152.88,11113.16 h30 r270
  text "GND" at 8058,11096 h30 r270
  text "V33" at 8154,11096 h30 r270
  text "V5" at 8257,11096 h30 r270
  text "0.0" at 6854,11090 h30 r270
  text "0.4" at 7861,11085 h30 r270
  text "0.6" at 7754,11082 h30 r270
  text "0.2" at 7958,11080 h30 r270
  text "0.8" at 7666.06,11043.57 h30 r270
  text "USB_3.0" at 8534,10790 h100
  text "SYNC" at 8682,10678 h60
  text "DBST" at 7893,10317 h25
  text "GND" at 8051,9726 h30 r270
  text "V33" at 8154,9726 h30 r270
  text "V5" at 8255,9726 h30 r270
  text "GND" at 8051,9324.09 h30 r270
  text "V33" at 8160.34,9324.09 h30 r270
  text "V5" at 8259,9324.09 h30 r270
Top Solder:
  region: 8910.96,9587 cw(c8780.62,9587.3) 8780.31,9456.96 cw(c8780.35,9586.96) 8650.35,9587 cw(c8780.31,9587) 8780.31,9716.96 cw(c8780.66,9586.66)
  region: 8910.91,11327.73 cw(c8780.57,11328.04) 8780.27,11197.7 cw(c8780.3,11327.7) 8650.3,11327.73 cw(c8780.27,11327.73) 8780.27,11457.7 cw(c8780.61,11327.39)
  region: 5957.96,9592 cw(c5827.62,9592.3) 5827.31,9461.96 cw(c5827.35,9591.96) 5697.35,9592 cw(c5827.31,9592) 5827.31,9721.96 cw(c5827.66,9591.66)
  region: 5957.96,11324 cw(c5827.62,11324.3) 5827.31,11193.96 cw(c5827.35,11323.96) 5697.35,11324 cw(c5827.31,11324) 5827.31,11453.96 cw(c5827.66,11323.66)
Bottom Solder:
  pour cut-out: 5958.28,9586.84 cw(c5826.69,9595.24) 5827.59,9463.39 cw(c5826.16,9597.24) 5729.33,9504.82 cw(c5823.17,9587.56) 5698.65,9599.67 cw(c5826.34,9592.87) 5823.01,9720.7 cw(c5827.46,9584.82) 5877.32,9711.3 cw(c5827.41,9590.27)
  pour cut-out: 8911.28,9582.84 cw(c8779.69,9591.24) 8780.59,9459.39 cw(c8779.16,9593.24) 8682.33,9500.82 cw(c8776.17,9583.56) 8651.65,9595.67 cw(c8779.34,9588.87) 8776.01,9716.7 cw(c8780.46,9580.82) 8830.32,9707.3 cw(c8780.41,9586.27)
  pour cut-out: 5957.47,11323.96 cw(c5828.52,11322.87) 5831.71,11193.95 cw(c5831.71,11328.29) 5697.38,11328.29 cw(c5827.39,11323.97) 5829.59,11454.03 cw(c5828.5,11325.06)
  pour cut-out: 8911.28,11323.84 cw(c8779.69,11332.24) 8780.59,11200.39 cw(c8779.16,11334.24) 8682.33,11241.82 cw(c8776.17,11324.56) 8651.65,11336.67 cw(c8779.34,11329.87) 8776.01,11457.7 cw(c8780.46,11321.82) 8830.32,11448.3 cw(c8780.41,11327.27)
Mechanical 11:
  lines w3.94: 8173,9562.86 8569,9562.86 ; 8311,11350.25 8578,11350.25

## Text inside footprints (layer, text, board x,y; h text height)
P5: Bottom Overlay "40" at 6280.41,9700.36 h30; Bottom Overlay "39" at 6290.41,9390.36 h30; Bottom Overlay "2" at 8380.41,9670.36 h30; Bottom Overlay "1" at 8380.41,9420.36 h30
P6: Bottom Overlay "1" at 8380.79,11207.75 h30; Bottom Overlay "2" at 8380.79,11457.75 h30; Bottom Overlay "39" at 6290.79,11177.75 h30; Bottom Overlay "40" at 6280.79,11487.75 h30
SW1: Mechanical 11 "2" at 5881.35,10265.28 h25; Mechanical 11 "1" at 5696.31,10265.28 h25; Mechanical 11 "3" at 6066.39,10265.28 h25